# Altium PCB EFNMR_POWER_V1.PcbDoc
Units mm, origin at the board's own origin, x right, y up, seen from the top; angles counter-clockwise.
Board outline 65.91 x 74.42 mm, 2 copper layers (Top Layer, Bottom Layer); 22 components, 13 nets, 65 pads, 0 vias.
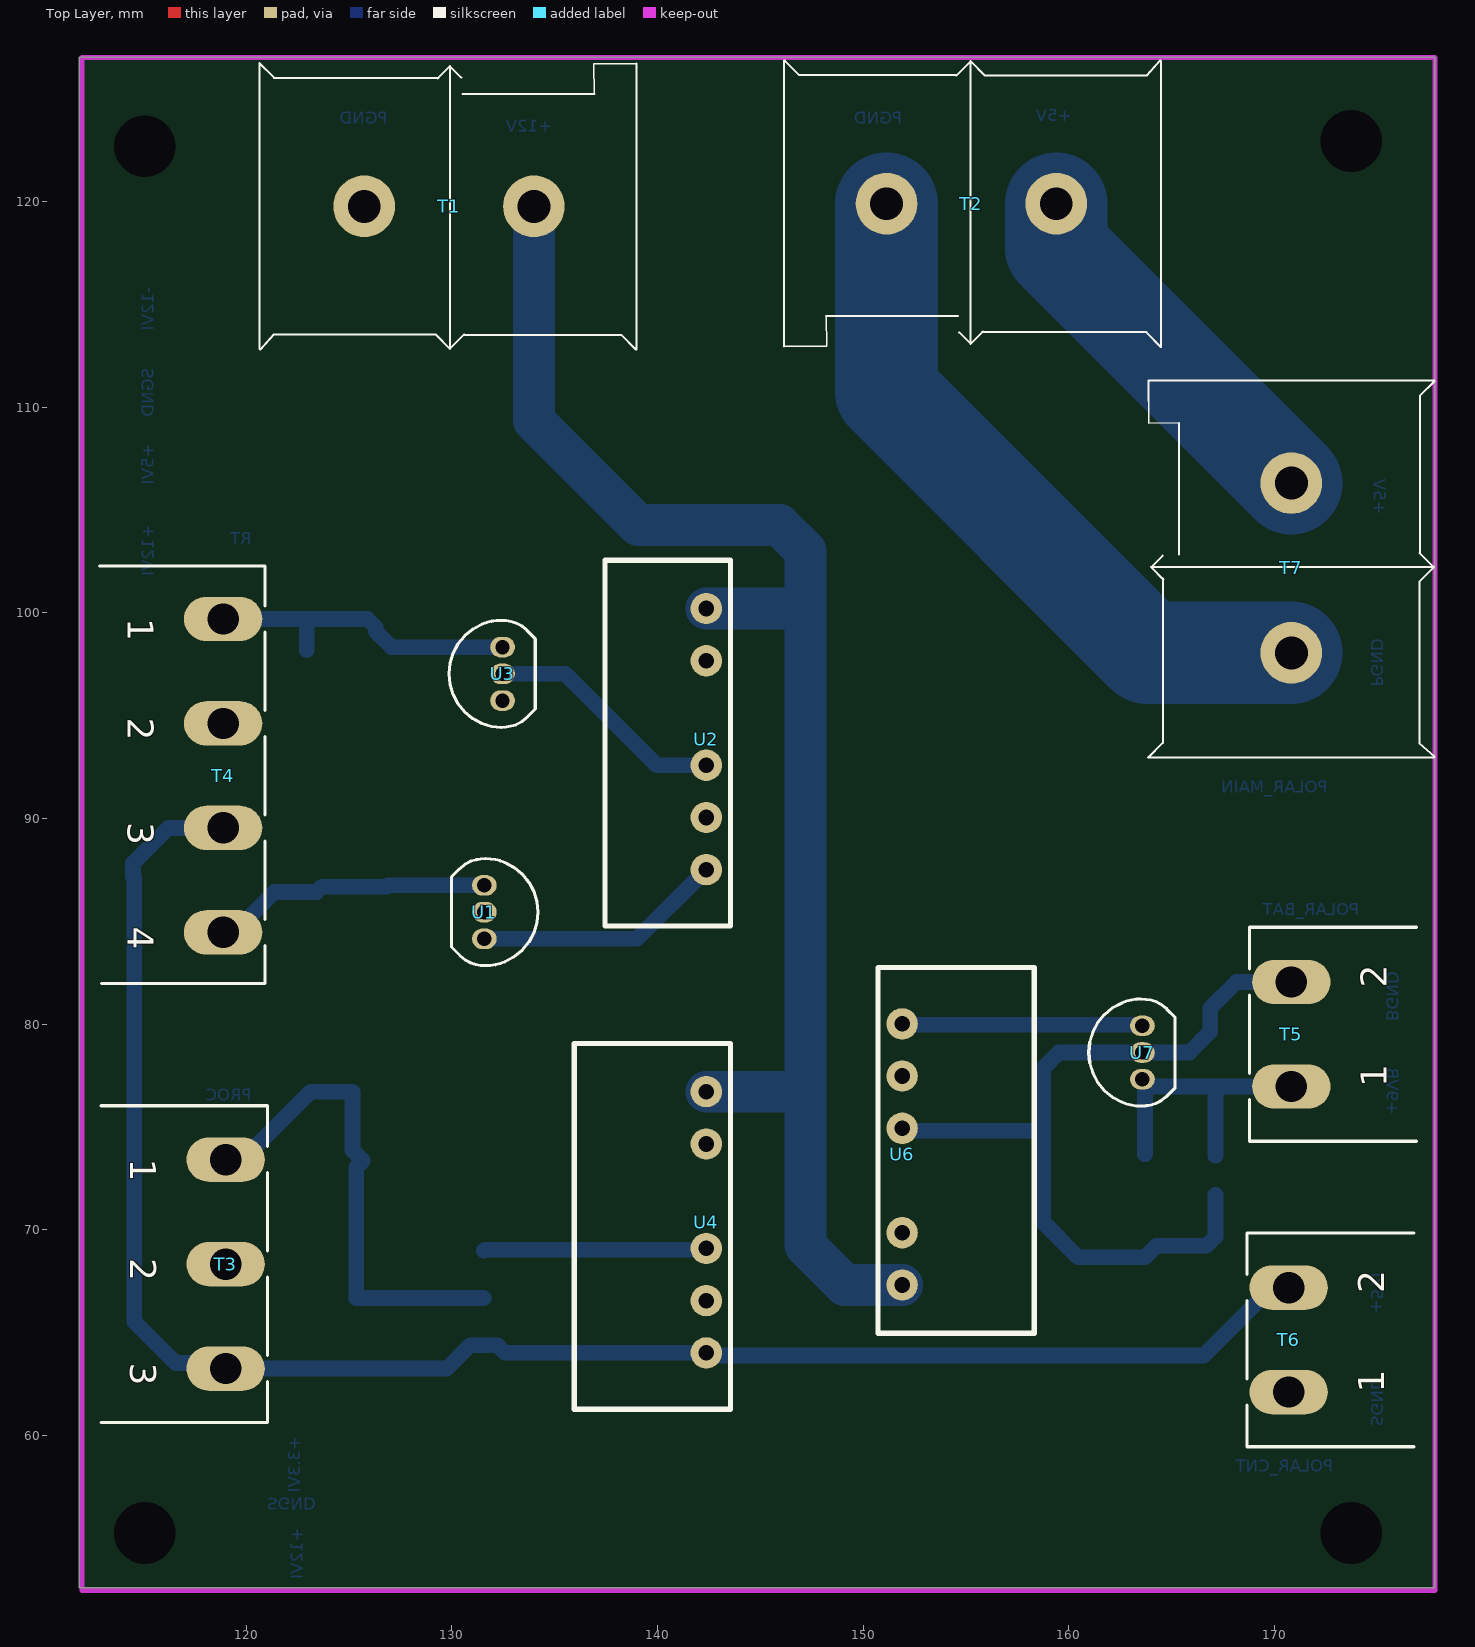
[diagram p0: Top Layer view]
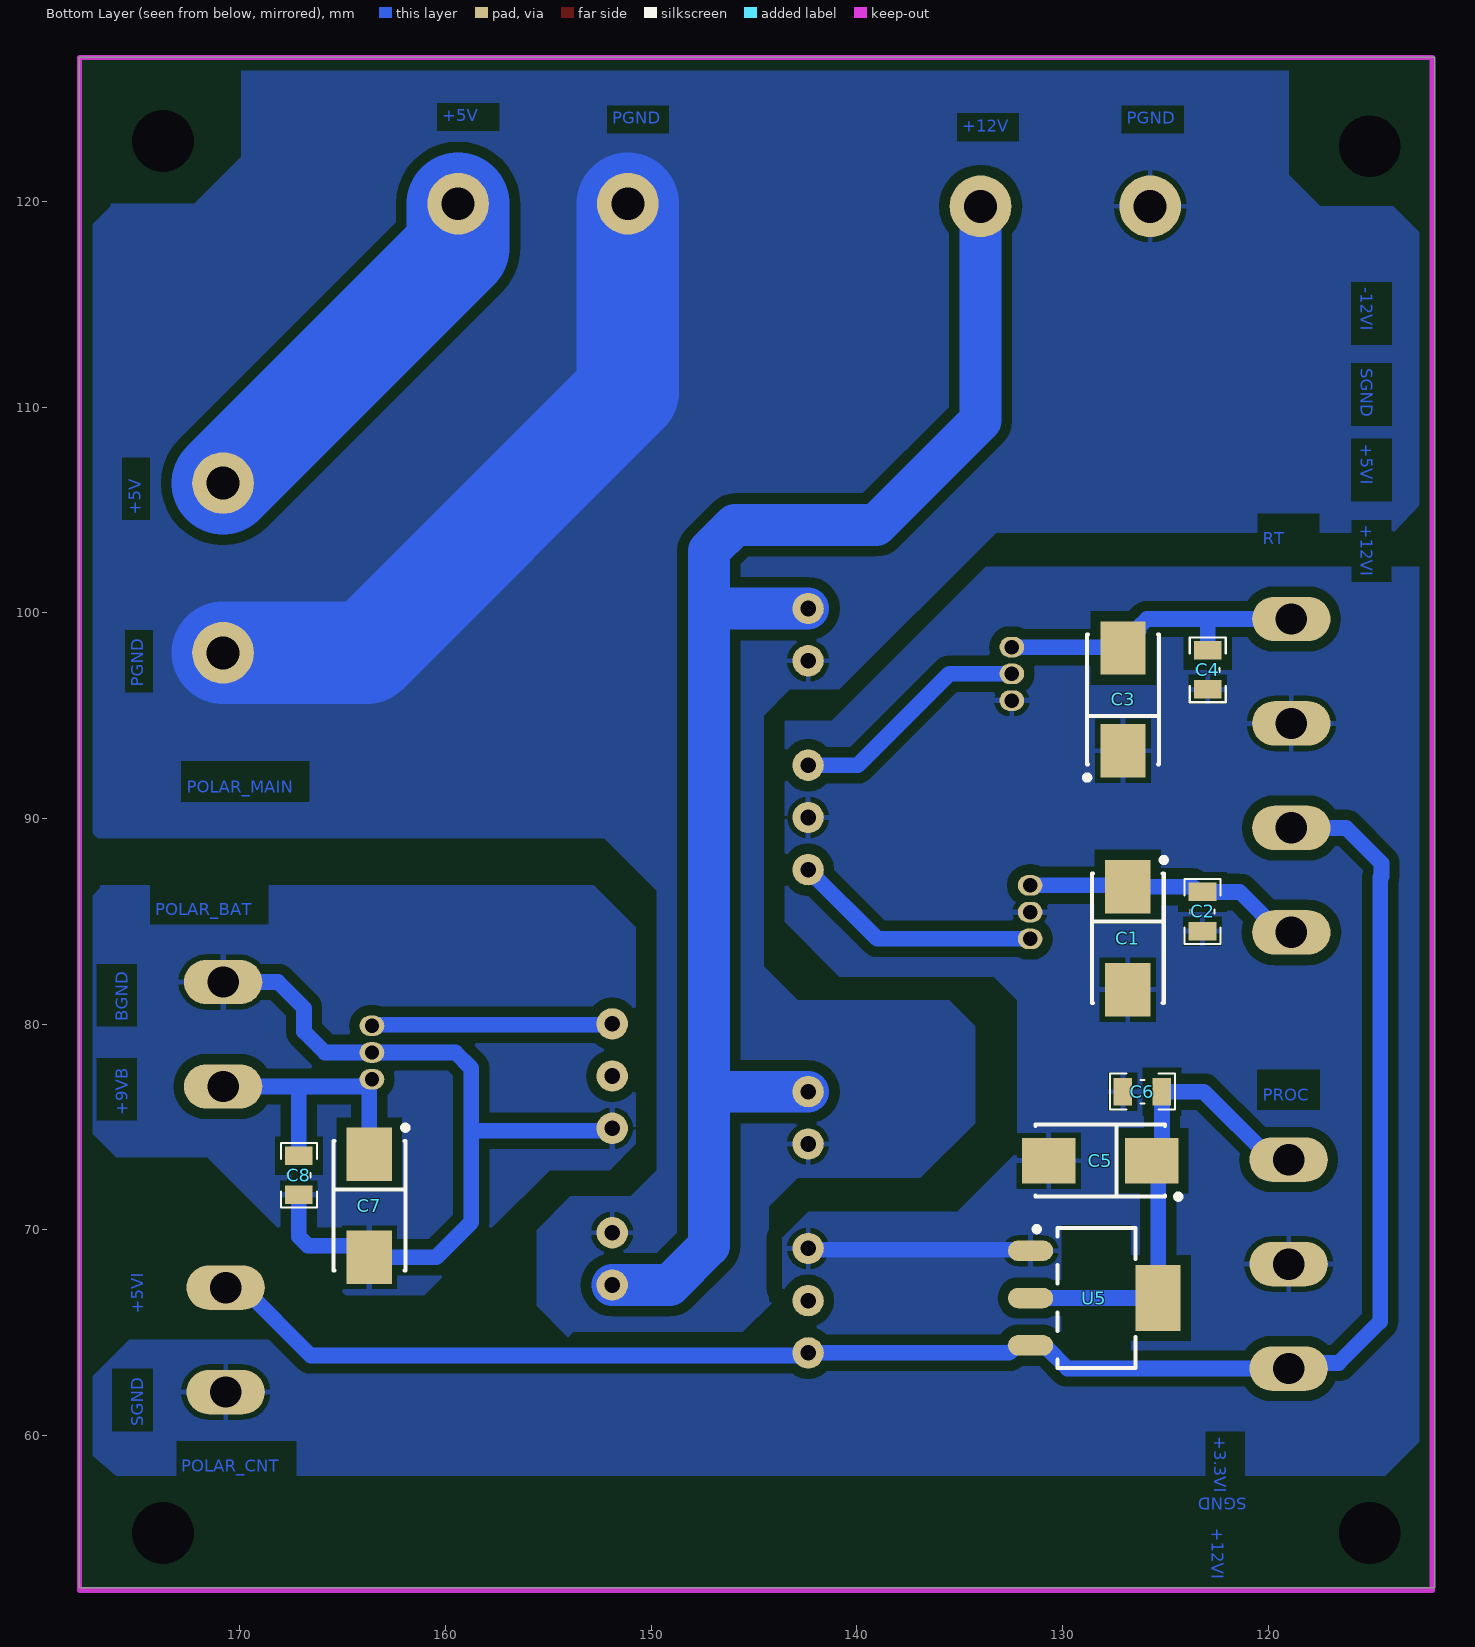
[diagram p1: Bottom Layer view, seen from below]
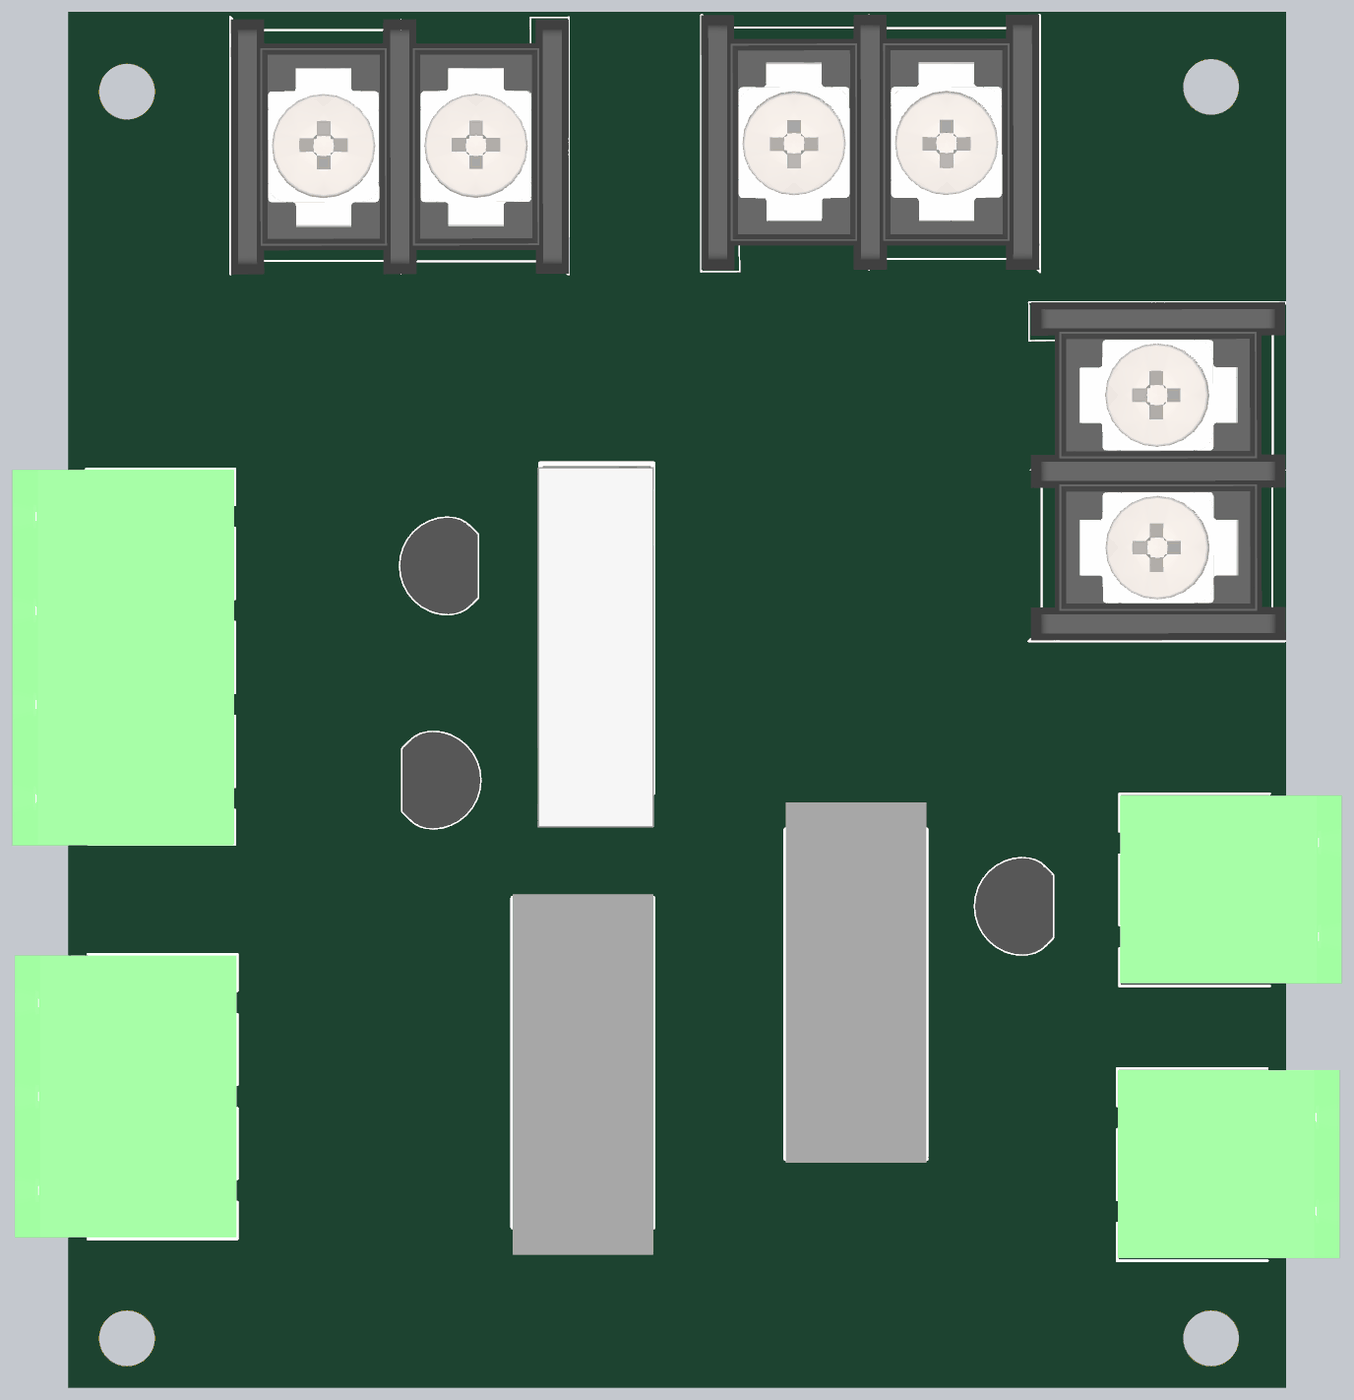
[diagram p2: 3D render of the assembled board from above, using the file's embedded part models]
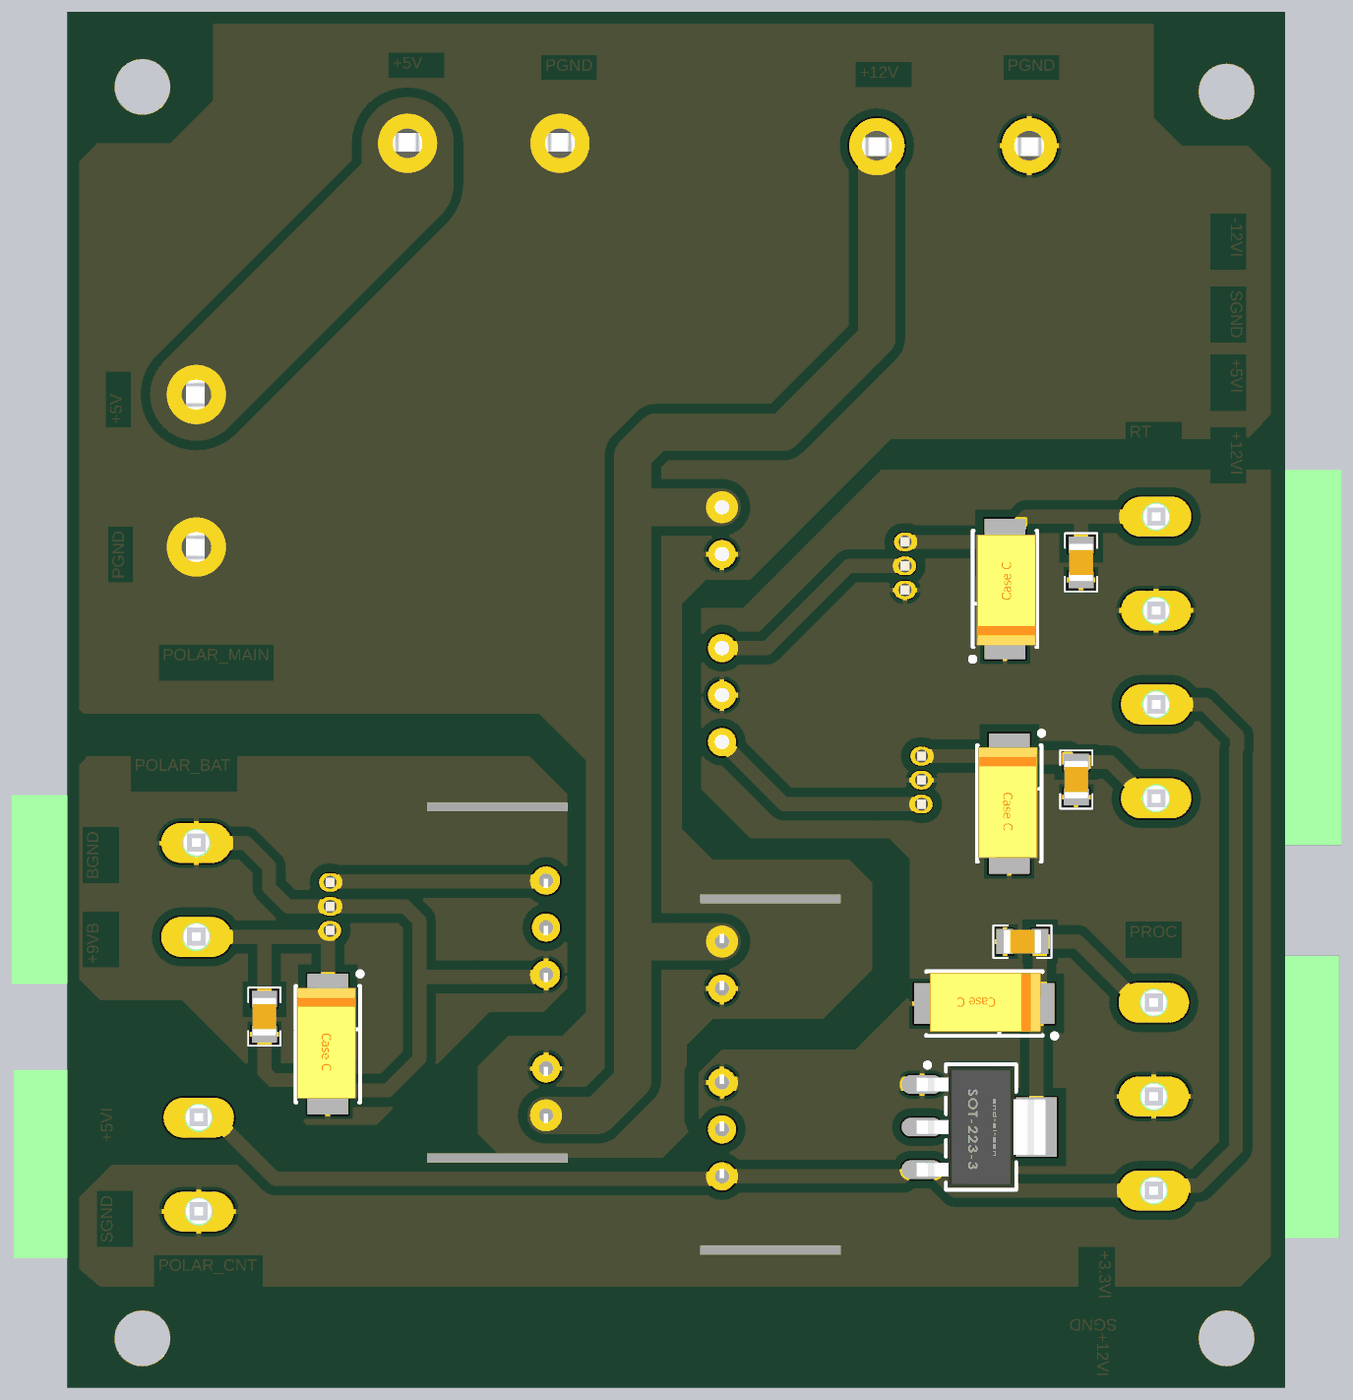
[diagram p3: 3D render of the assembled board from below, using the file's embedded part models]

## Layer stack, top to bottom
Top Solder: solder mask 0.0102, Solder Resist, Dk 3.5
Top Layer: signal copper 0.0356
Dielectric 1: dielectric 0.32, FR-4, Dk 4.8
Bottom Layer: signal copper 0.0356
Bottom Solder: solder mask 0.0102, Solder Resist, Dk 3.5

## Board outline
111.887,52.578 177.8,52.578 177.8,127 111.887,127

## Design rules (kind name [scope] priority, off if disabled: settings)
Clearance [All] p1: gap=0.254 ignorepadtopadclearanceinfootprint=FALSE except(0: Arc-Hole Track-Hole SMDPad-Hole THPad-Hole Via-Hole Fill-Hole Poly-Hole Region-Hole Text-Hole; 0.508: Arc-Fill Arc-Poly Arc-Region Track-Fill Track-Poly Track-Region SMDPad-Fill SMDPad-Poly SMDPad-Region THPad-Fill THPad-Poly THPad-Region; 0.762: Fill-Fill Fill-Poly Fill-Region Poly-Poly Poly-Region Region-Region)
PolygonConnect [All] p1: connectstyle=Relief reliefconductorwidth=0.254 reliefentries=4 polygonreliefangle="90 Angle" airgapwidth=0.254
RoutingVias [All] p1: holewidth=0.711 width=1.27 viastyle="Through Hole" minholewidth=0.711 minwidth=1.27 maxholewidth=0.711 maxwidth=1.27
SolderMaskExpansion [All] p1: expansion=0.102
Width [All] p1: maxlimit=12.7 minlimit=0.254 preferedwidth=0.254 minimp=50.000000 maximp=50.000000 favimp=50.000000
30 further rules are at their usual default settings.

## Components (designator, comment, footprint, x,y, rotation, side; value= is the part's Value field where it differs from the comment)
C1 "25V" CAP_TANTAL_TYPE_C 127.127,83.82 r90 bottom value=10uF
C2 "Cap" CAP0805 123.19,85.471 r90 bottom value=100nF
C3 "25V" CAP_TANTAL_TYPE_C 126.746,96.139 r270 bottom value=10uF
C4 "Cap" CAP0805 122.936,97.221 r90 bottom value=100nF
C5 "Tantal/16V" CAP_TANTAL_TYPE_C 128.524,73.66 r180 bottom value=10uF
C6 "Cap" CAP0805 126.111,76.708 r180 bottom value=100nF
C7 "25V" CAP_TANTAL_TYPE_C 164.008,70.804 r90 bottom value=10uF
C8 "Cap" CAP0805 167.132,72.644 r90 bottom value=100nF
T1 "FROM POWER SUPPLY" "KF35C 2PIN" 129.86,119.761 r0 top
T2 "FROM POWER SUPPLY" "KF35C 2PIN" 155.26,119.888 r180 top
T3 "1759020" "MSTB 2,5/3-G-5,08" 118.999,68.326 r270 top
T4 "1753479" "MSTB 2,5/4-G-5,08" 118.872,92.075 r270 top
T5 "Battery" "MSTB 2,5/2-G-5,08" 170.815,79.502 r90 top
T6 "1770711" "MSTB 2,5/2-G-5,08" 170.688,64.643 r90 top
T7 "To Polarizartion" "KF35C 2PIN" 170.815,102.174 r90 top
U1 "MC78L12ABP" "TO-92 STR" 131.572,85.441 r270 top
U2 "MA01-12D15" MA01-MINMAX 142.367,100.203 r270 top
U3 "MC79L12ABP" "TO-92 STR" 132.461,97.028 r90 top
U4 "MA03-12S05" MA03-S-MINIMAX 142.367,76.708 r270 top
U5 "AMS1117-3.3" SOT223_4 128.349,66.675 r180 bottom
U6 "MA03-12S12" MA03-S-MINIMAX 151.892,67.31 r90 top
U7 "KIA78S09P" "TO-92 STR" 163.576,78.613 r90 top

## Footprints (in the part's own frame and the unit in brackets; to place one, negate y for a bottom-side part, rotate by r counter-clockwise, add the part's x,y. Pads: shape width x height; smd on the part's side, far side on the other; paste and mask are expansions set on the pad)
CAP0805 [mm] "Chip Capacitor, 2-Leads, Body 2/00x1/25mm, IPC Medium Density DESIGNER:ABBAS BASEREH"
  rect 0.9x1.35 smd: 1(-0.95,0) 2(0.95,0)
  silkscreen extent -1.58,-0.87 1.58,0.87, body extent -1.02,-0.65 1.02,0.65, height 0.5
CAP_TANTAL_TYPE_C [mm]
  rect 2.6x2.2 smd: 1(2.856,-0.305) 2(-2.144,-0.305)
  silkscreen extent -2.79,-2.18 4.28,1.45, body extent -2.6,-1.83 3.4,1.37, height 2.5
"KF35C 2PIN" [mm]
  round 3 hole 1.6: 1(-4.125,0) 2(4.125,0)
  silkscreen extent -9.22,-6.97 9.12,6.97, body extent -9.18,-6.97 9.13,6.83, height 15.07
MA01-MINMAX [mil]
  round 60 hole 30: 1(0,0) 2(100,0) 4(300,0) 5(400,0) 6(500,0)
  silkscreen extent -93,-194 608,46, body extent -86,-200 682,48, height 394
MA03-S-MINIMAX [mil]
  round 60 hole 30: 1(0,0) 2(100,0) 4(300,0) 5(400,0) 6(500,0)
  silkscreen extent -93,-253 608,46, body extent -101,-253 667,46, height 382
"MSTB 2,5/2-G-5,08" [mil] "Header, Nominal current: 12 A Rated voltage (III/2): 320 V Number of positions: 2 Pitch: 5.08 mm Color: green Contact surface: Tin Assembly: Soldering DESIGNER:ABBAS BASEREH"
  oval 85x150 hole 60: 1(-100,0) 2(100,0)
  silkscreen extent -205,-240 205,80, body extent -199,-394 201,79, height 340
"MSTB 2,5/3-G-5,08" [mil] "Header, Nominal current: 12 A Rated voltage (III/2): 320 V Number of positions: 3 Pitch: 5.08 mm Color: green Contact surface: Tin Assembly: Soldering  DESIGNER:ABBAS BASEREH"
  oval 85x150 hole 60: 1(-200,0) 2(0,0) 3(200,0)
  silkscreen extent -303,-238 303,80, body extent -300,-394 300,79, height 340
"MSTB 2,5/4-G-5,08" [mil] "Header, Nominal current: 12 A Rated voltage (III/2): 320 V Number of positions: 4 Pitch: 5,08 mm Color: green Contact surface: Tin Assembly: Soldering  DESIGNER ABBAS BASEREH"
  oval 85x150 hole 60: 1(-300,0) 2(-100,0) 3(100,0) 4(300,0)
  silkscreen extent -402,-237 398,80, body extent -400,-394 400,79, height 339
SOT223_4 [mm] "SOT223, 4-Leads, Body 6.5x3.5mm, Pitch 2.30mm-Designer Abbas Basereh"
  oval 2.2x1 smd: 1(-3.2,2.3) 2(-3.2,0) 3(-3.2,-2.3)
  rect 2.2x3.2 smd: 4(3,0)
  Top Layer pour cut-out: -1.7,3.556 1.7,3.556 1.7,-3.556 -1.7,-3.556
  silkscreen extent -3.03,-3.4 1.9,3.47, body extent -3.5,-3.25 3.5,3.25, height 1.7
"TO-92 STR" [mm] "DESIGNER :ABBAS BASEREH"
  oval 1x1.2 hole 0.7 mask+0.06: 1(-1.3,0) 2(0,0) 3(1.3,0)
  silkscreen extent -2.6,-1.59 2.6,2.61, body extent -2.61,-1.59 2.61,2.61, height 10

## Part data
C1 C3 C5 C7: library part Cap2, "Capacitor", PackageDescription="Capacitor; 2 Leads", PackageReference=CAPR5-4X5, Published=23-Sep-2002, Publisher="Altium Limited"
C2 C4 C6 C8: "Capacitor", LatestRevisionDate=17-Jul-2002, LatestRevisionNote="Re-released for DXP Platform.", PackageDescription="Radial Cap, Thru-Hole; 2 Leads; 0.3 in Pin Spacing", PackageReference=RAD-0.3, Published=8-Jun-2000, Publisher="Altium Limited"
T1 T2 T7: library part "Header 2", "Header, 2-Pin", LatestRevisionDate=17-Jul-2002, LatestRevisionNote="Re-released for DXP Platform.", Publisher="Altium Limited"
T3: library part CON_Phoenix_MSTB_03, "3 Pitch: 5.08 mm Color: green Contact surface: Tin Assembly", Manufacturer="PHOENIX CONTACT", Max Current="12 A", Voltage="320 V", Category=Connector, ComponentLink1Description="Header, Nominal current: 12 A Rated voltage (III/2): 320 V Number of positions: 3 Pitch: 5.08 mm Color: green Contact surface: Tin Assembly: Soldering  DESIGNER:ABBAS BASEREH", ComponentLink2Description=Reference, Connector Type="PCB Terminal Block", Designer="ABBAS BASEREH", Mounting Technology=Through-Hole, Part.No=1759020, Pin Count=3, Positions=3, Revision 1=2017-3-1, Status=Unreleased
T4: library part CON_Phoenix_MSTBV_04, "4 Pitch: 5 mm Color: green Contact surface: Tin Assembly", Manufacturer="PHOENIX CONTACT", Max Current="12 A", Voltage="320 V", Category=Connector, ComponentLink1Description="Header, Nominal current: 12 A Rated voltage (III/2): 320 V Number of positions: 4 Pitch: 5 mm Color: green Contact surface: Tin Assembly: Soldering  DESIGNER:ABBAS BASEREH", ComponentLink2Description=Reference, Connector Type="PCB Terminal Block", Designer="ABBAS BASEREH", Mounting Technology=Through-Hole, Part.No=1753479, Pin Count=4, Positions=4, Revision 1=2017-3-1, Status=Unreleased
T5 T6: library part CON_Phoenix_MSTB_02, "2 Pitch: 5.08 mm Color: green Contact surface: Tin Assembly", Manufacturer="PHOENIX CONTACT", Max Current="12 A", Voltage="320 V", Category=Connector, ComponentLink1Description="Header, Nominal current: 12 A Rated voltage (III/2): 320 V Number of positions: 2 Pitch: 5.08 mm Color: green Contact surface: Tin Assembly: Soldering  DESIGNER:ABBAS BASEREH", ComponentLink2Description=Reference, Connector Type="PCB Terminal Block", Designer="ABBAS BASEREH", Mounting Technology=Through-Hole, Part.No=1770711, Pin Count=2, Positions=2, Revision 1=2017-3-1, Status=Unreleased
U1: "3-Terminal Low-Current Positive Fixed Voltage Regulator", ComponentLink1Description="Manufacturer Link", ComponentLink1URL=http://www.onsemi.com/site/products/taxonomy/0,4438,503,00.html, ComponentLink2Description=Datasheet, ComponentLink2URL=http://www.onsemi.com/pub/Collateral/MC78L00A-D.PDF, DatasheetVersion=1988, PackageDescription="TO, Flat Index; 3 In-Line, Axial Leads; Body Dia. 4.8mm; Leads 0.48 x 0.5 mm (max)", PackageReference=29-04, PackageVersion=1996, Published=17-Jul-2002, Publisher="Altium Limited"
U2 U4 U6: library part "Header 6", "Header, 6-Pin", LatestRevisionDate=17-Jul-2002, LatestRevisionNote="Re-released for DXP Platform.", Publisher="Altium Limited"
U3: "Three-Terminal Low-Current Negative Fixed Voltage Regulator", ComponentLink1Description="Manufacturer Link", ComponentLink1URL=http://www.onsemi.com/site/products/taxonomy/0,4438,503,00.html, ComponentLink2Description=Datasheet, ComponentLink2URL=http://www.onsemi.com/pub/Collateral/MC79L00-D.PDF, DatasheetVersion=1988, PackageDescription="TO, Flat Index; 3 In-Line, Axial Leads; Body Dia. 4.8mm; Leads 0.48 x 0.5 mm (max)", PackageReference=29-04, PackageVersion=1996, Published=17-Jul-2002, Publisher="Altium Limited"
U5: library part HT1117-33_SOT223, "3.3V, 1A General Purpose LDO", ComponentLink1Description="Manufacturer URL", ComponentLink1URL=http://www.holtek.com/, ComponentLink2Description=Datasheet, ComponentLink2URL=http://www.holtek.com/pdf/consumer/1117v110.pdf, ComponentLink3Description="Package Specification", ComponentLink3URL=http://www.holtek.com/english/literature/package.pdf, DatasheetVersion="rev1.10, Mar-2008", PackageDescription="4-Pin SOT-223 Package, 6.5 x 3.5 mm Body, 2.3 mm Pitch, 7 mm Lead Span", PackageReference=SOT223, PackageVersion=25/05/2010
U7: library part MC78L12ABP, "3-Terminal Low-Current Positive Fixed Voltage Regulator", ComponentLink1Description="Manufacturer Link", ComponentLink1URL=http://www.onsemi.com/site/products/taxonomy/0,4438,503,00.html, ComponentLink2Description=Datasheet, ComponentLink2URL=http://www.onsemi.com/pub/Collateral/MC78L00A-D.PDF, DatasheetVersion=1988, PackageDescription="TO, Flat Index; 3 In-Line, Axial Leads; Body Dia. 4.8mm; Leads 0.48 x 0.5 mm (max)", PackageReference=29-04, PackageVersion=1996, Published=17-Jul-2002, Publisher="Altium Limited"

## Free pads (board coordinates)
  round 1.524 hole 3: 12(173.736,55.245) 13(173.736,122.936) 14(115.062,122.682) 15(115.062,55.245)

## Nets (pads, with @x,y where several pads share a name; then routed paths per layer and width w, separated by ;. In a path a pad name is that pad's centre, name@x,y a point inside that pad or via, vN(x,y) a via of type N, cw(c..) or ccw(c..) an arc to the next point about the centre after c; other vN are vias at no path point)
+3.3VI: C5.1 C6.2 T3.1 U5.2 U5.4 | length 24.1
  Bottom Layer w0.762: T3.1@119.024,73.381 T3.1 119.825,73.406 123.126,76.708 C6.2 125.161,73.863 C5.1 125.349,73.036 U5.4 U5.2
+5V: T2.1 T7.2 | length 18.3
  Bottom Layer w5: T2.1 159.385,117.729 T7.2
+5VI: T3.3 T4.3 T6.2 U4.6 U5.3 | length 86.5
  Bottom Layer w0.762: T4.3 116.205,89.535 114.489,87.819 114.489,87.187 114.554,87.122 114.554,65.532 116.573,63.513 118.732,63.513 T3.3 129.756,63.246 130.885,64.375 U5.3 132.213,64.375 132.58,64.008 U4.6 142.494,63.881 166.56,63.881 169.862,67.183 T6.2
+9VB: C7.1 C8.2 T5.1 U7.1 | length 14.5
  Bottom Layer w0.762: U7.1 U7.1@163.593,77.313 ; C7.1 163.703,77.203 U7.1@163.593,77.313 ; C8.2 167.132,76.835 167.005,76.962 ; T5.1 167.005,76.962 ; U7.1@163.593,77.313 163.74,77.313 164.091,76.962 167.005,76.962
+12V: T1.2 U2.1 U4.1 U6.1 | length 75.4
  Bottom Layer w2.032: T1.2 133.985,109.347 139.065,104.267 145.923,104.267 147.193,102.997 147.193,100.076 ; U4.1 146.685,76.708 147.193,77.216 ; U2.1 147.066,100.203 147.193,100.076 ; U6.1 149.098,67.31 147.193,69.215 147.193,77.216 ; 147.193,77.216 147.193,100.076
+12VB: U6.6 U7.3 | length 11.7
  Bottom Layer w0.762: U6.6 151.943,79.959 163.53,79.959 U7.3
+12VI: C1.1 C2.2 T4.4 U1.1 | length 13.6
  Bottom Layer w0.762: T4.4 119.406,84.455 121.372,86.421 C2.2 123.415,86.421 123.67,86.676 C1.1 126.888,86.741 U1.1
+15VI: U1.3 U2.6 | length 12.2
  Bottom Layer w0.762: U1.3 139.005,84.141 U2.6
-12VI: C3.2 C4.2 T4.1 U3.3 | length 15.8
  Bottom Layer w0.762: T4.1 122.809,99.695 ; C4.2 122.936,99.568 122.809,99.695 ; U3.3 127.06,98.328 126.289,99.099 126.289,99.299 125.893,99.695 122.809,99.695
-15VI: U2.4 U3.2 | length 11.7
  Bottom Layer w0.762: U3.2 135.509,97.028 139.954,92.583 U2.4
BGND: C7.2 C8.1 T5.2 U6.4 U7.2 | length 40.4
  Bottom Layer w0.762: U6.4 152.019,74.803 158.75,74.803 ; C8.1 167.132,69.661 166.686,69.215 164.258,69.215 C7.2 160.448,68.66 158.75,70.358 158.75,74.803 ; T5.2 168.148,82.042 166.878,80.772 166.878,79.629 165.862,78.613 U7.2 159.512,78.613 158.75,77.851 158.75,74.803
PGND: T1.1 T2.2 T7.1 U2.2 U4.2 U6.2 | length 34.1
  Bottom Layer w5: T2.2 151.135,110.744 163.83,98.049 T7.1
SGND: C1.2 C2.1 C3.1 C4.1 C5.2 C6.1 T3.2 T4.2 T6.1 U1.2 U2.5 U3.1 U4.4 U5.1 | length 10.9
  Bottom Layer w0.762: U5.1 131.595,69.021 142.3,69.021 U4.4
pads on no net: U4.5 U6.5

## Polygon pours and split planes (outlines as drawn)
no net on Bottom Layer "Bottom Layer-No Net" (solid, pour order 8): 103.759,102.743
PGND on Bottom Layer "Bottom Layer-PGND" (solid, remove dead copper, pour order 6): 112.014,105.918 111.887,106.045 111.887,117.729 113.919,119.761 117.475,119.761 118.999,121.285 118.999,127 119.126,126.873 169.926,126.873 169.926,122.174 172.212,119.888 176.276,119.888 176.276,119.761 177.8,118.237 177.8,89.916 176.911,89.027 152.273,89.027 149.733,86.487 149.733,72.898 151.003,71.628 153.924,71.628 155.575,69.977 155.575,66.294 154.051,64.77 153.797,65.024 145.542,65.024 144.145,66.421 144.272,66.548 144.272,71.12 142.875,72.517 136.906,72.517 134.239,75.184 134.239,79.883 135.509,81.153 142.875,81.153 144.526,82.804 144.526,94.996 143.256,96.266 140.843,96.266 133.223,103.886 113.919,103.886
no net on Bottom Layer "Bottom Layer-No Net 1" (solid, pour order 4): 111.887,119.253
BGND on Bottom Layer "Bottom Layer-BGND" (solid, remove dead copper, pour order 2): 177.673,85.725 176.784,86.614 176.784,86.741 152.781,86.741 150.749,84.709 150.749,74.168 152.019,72.898 154.94,72.898 161.036,66.802 164.846,66.802 171.577,73.533 176.022,73.533 177.673,75.184
SGND on Bottom Layer "Bottom Layer-SGND" (solid, remove dead copper, pour order 0): 111.887,102.235 133.731,102.235 141.224,94.742 143.51,94.742 143.51,84.963 140.843,82.296 133.35,82.296 132.207,81.153 132.207,73.787 135.128,70.866 142.367,70.866 143.637,69.596 143.637,64.643 175.387,64.643 177.673,62.357 177.673,59.436 176.022,58.039 114.3,58.039 111.887,60.452

## Keep-outs
Keep-Out Layer:
  lines w0.254: 112.014,52.451 112.014,127 177.8,127 177.8,57.15 177.8,52.451 112.014,52.451

## Other copper
Bottom Layer:
  text "+5V" at 160.147,123.698 h1.02
  text "PGND" at 126.873,123.571 h1.02
  text "PGND" at 151.892,123.571 h1.02
  text "+12V" at 134.874,123.19 h1.02
  text "-12VI" at 115.697,115.824 h1.02 r90
  text "SGND" at 115.697,111.887 h1.02 r90
  text "+5VI" at 115.697,108.204 h1.02 r90
  text "+5V" at 174.625,104.775 h1.02 r270
  text "+12VI" at 115.697,104.267 h1.02 r90
  text "RT" at 120.269,103.124 h1.02
  text "PGND" at 174.498,96.393 h1.02 r270
  text "POLAR_MAIN" at 172.593,91.059 h1.02
  text "POLAR_BAT" at 174.117,85.09 h1.02
  text "BGND" at 175.26,80.137 h1.02 r270
  text "PROC" at 120.269,76.073 h1.02
  text "+9VB" at 175.26,75.565 h1.02 r270
  text "+5VI" at 174.498,65.913 h1.02 r270
  text "SGND" at 174.498,60.452 h1.02 r270
  text "+3.3VI" at 122.809,59.944 h1.02 r90
  text "POLAR_CNT" at 172.847,58.039 h1.02
  text "SGND" at 121.031,57.15 h1.02 r180
  text "+12VI" at 122.936,55.499 h1.02 r90

## Dimensions
177.8,127 to 177.8,52.451 on Mechanical 1
177.8,127 to 112.014,127 on Mechanical 1

## Text inside footprints (layer, text, board x,y; h text height)
T3: Top Overlay "3" at 114.364,63.532 h1.27 r270; Top Overlay "2" at 114.364,68.612 h1.27 r270; Top Overlay "1" at 114.364,73.438 h1.27 r270
T4: Top Overlay "4" at 114.237,84.741 h1.27 r270; Top Overlay "3" at 114.237,89.821 h1.27 r270; Top Overlay "2" at 114.237,94.901 h1.27 r270; Top Overlay "1" at 114.237,99.727 h1.27 r270
T5: Top Overlay "1" at 175.45,76.93 h1.27 r90; Top Overlay "2" at 175.45,81.756 h1.27 r90
T6: Top Overlay "1" at 175.323,62.071 h1.27 r90; Top Overlay "2" at 175.323,66.897 h1.27 r90